# Altium PCB PCB1.PcbDoc
Units mm, origin at the board's own origin, x right, y up, seen from the top; angles counter-clockwise.
Board outline 43 x 28 mm, 2 copper layers (Top Layer, Bottom Layer); 7 components, 5 nets, 22 pads, 0 vias.
Unrouted connection lines stored in the file: 2.
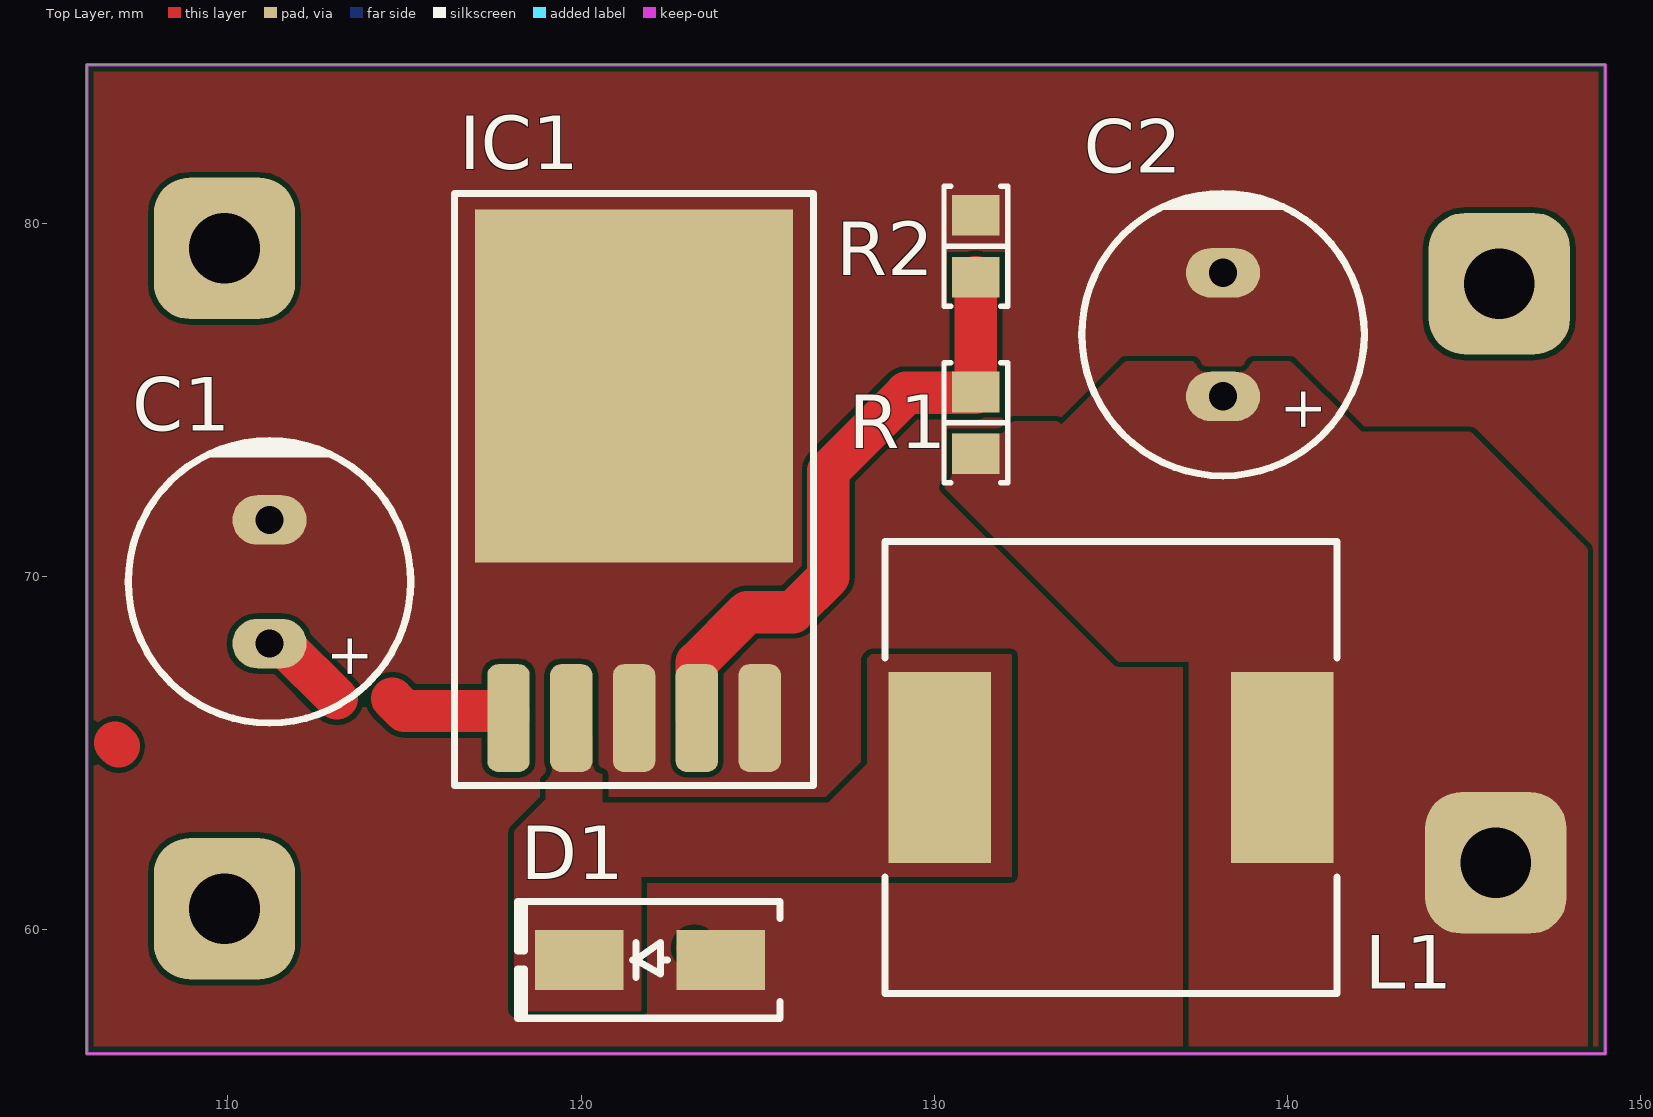
[diagram p0: Top Layer view]
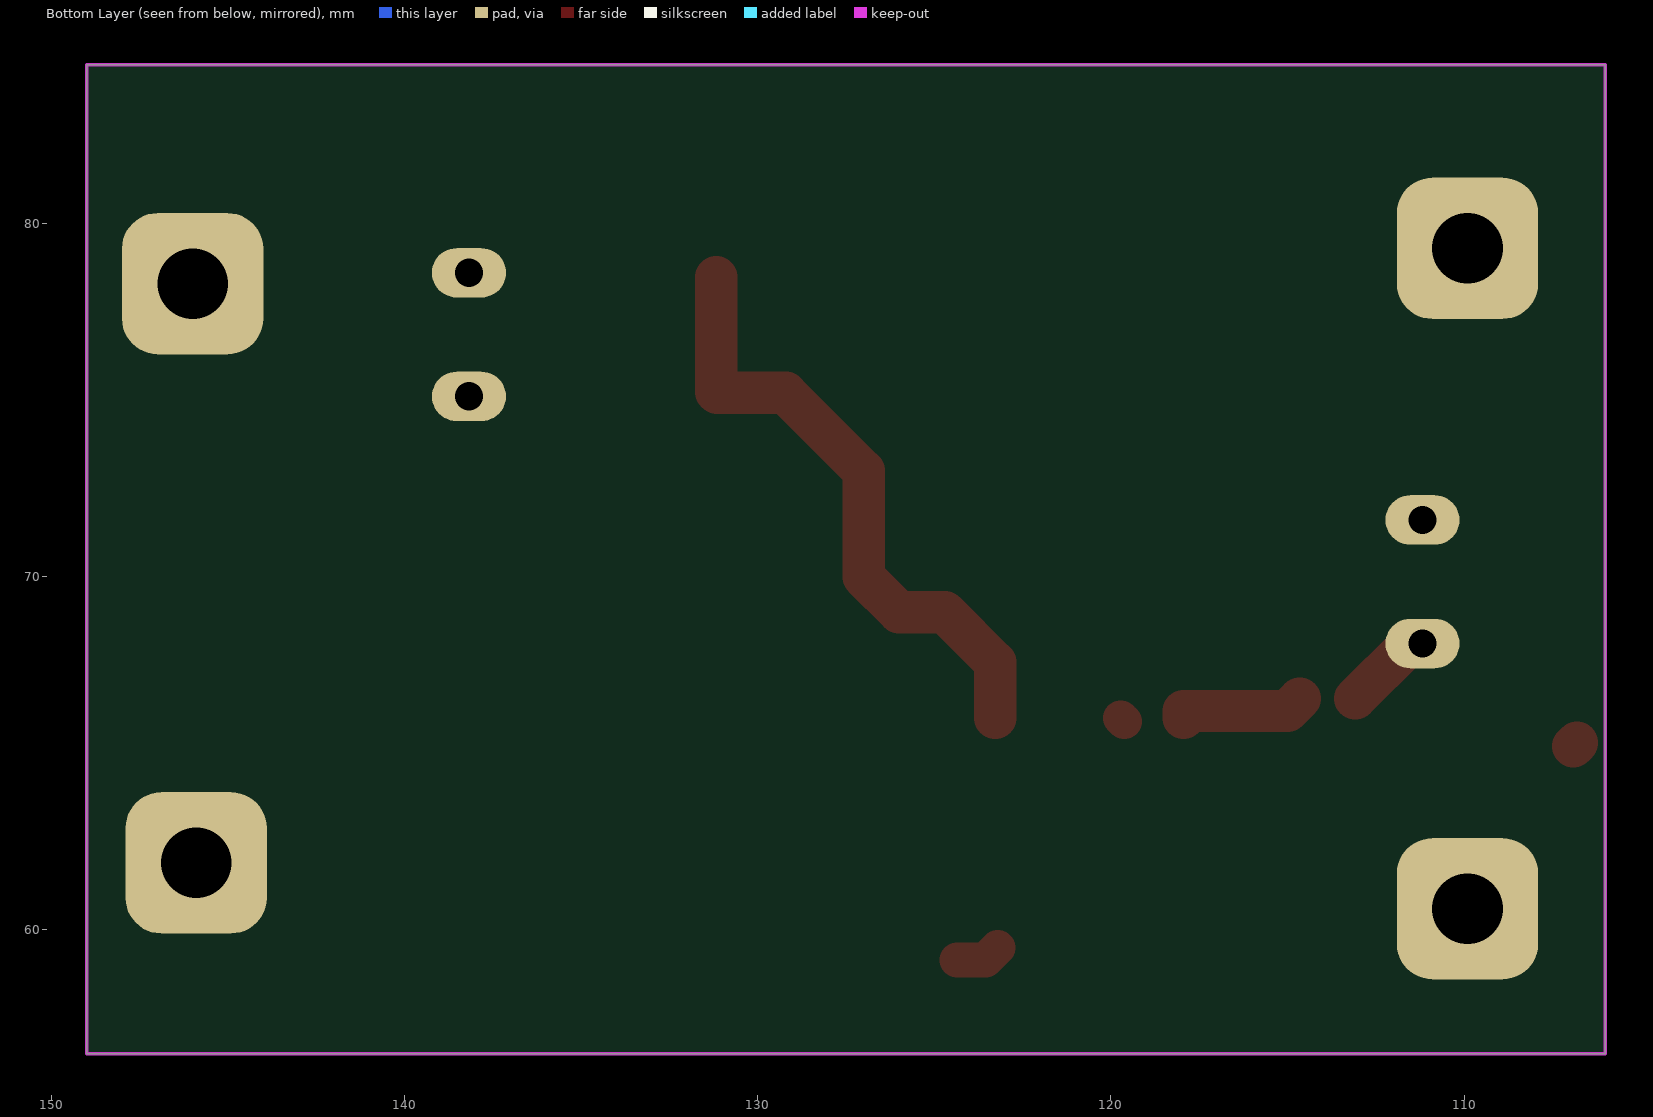
[diagram p1: Bottom Layer view, seen from below]
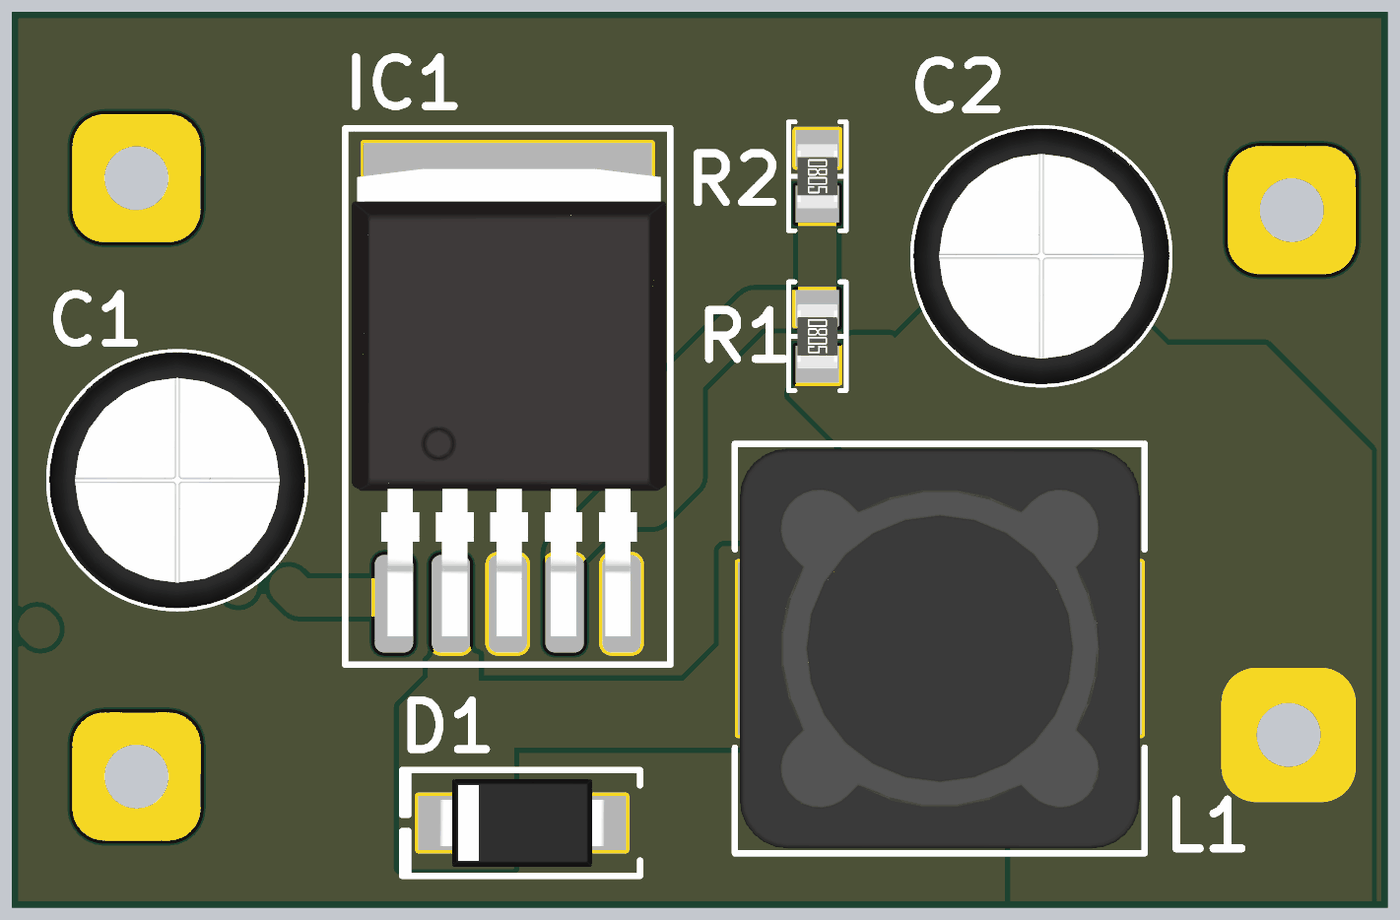
[diagram p2: 3D render of the assembled board from above, using the file's embedded part models]

## Layer stack, top to bottom
Top Solder: solder mask 0.0102, Solder Resist, Dk 3.5
Top Layer: signal copper 0.0356
Dielectric 1: dielectric 0.32, FR-4, Dk 4.8
Bottom Layer: signal copper 0.0356
Bottom Solder: solder mask 0.0102, Solder Resist, Dk 3.5

## Board outline
106,56.5 106,84.5 149,84.5 149,56.5

## Design rules (kind name [scope] priority, off if disabled: settings)
Clearance [All] p1: gap=0.152 ignorepadtopadclearanceinfootprint=TRUE
HoleSize [All] p1: absolutevalues=TRUE maxlimit=5 minlimit=0.025 maxpercent=80.000 minpercent=20.000
PolygonConnect [All] p1: connectstyle=Direct reliefconductorwidth=0.254 reliefentries=4 polygonreliefangle="90 Angle" airgapwidth=0.254
RoutingVias [All] p1: holewidth=0.711 width=1.27 viastyle="Through Hole" minholewidth=0.711 minwidth=1.27 maxholewidth=0.711 maxwidth=1.27
SolderMaskExpansion [All] p1: expansion=0.102 istentingtop=FALSE
Width [All] p1: maxlimit=2 minlimit=0.152 preferedwidth=0.5
29 further rules are at their usual default settings.

## Components (designator, comment, footprint, x,y, rotation, side; value= is the part's Value field where it differs from the comment)
C1 "100µF" "CAP TH ALUM ELEC D8.00mm S3.50mm H12.50mm" 111.176,69.859 r270 top
C2 "220µF" "CAP TH ALUM ELEC D8.00mm S3.50mm H12.50mm" 138.176,76.859 r270 top
D1 "ACDBA560-HF" "DO214AC SMA" 121.95,59.15 r180 top
IC1 "LM2596" PCBComponent_1 121.754,75.525 r0 top
L1 "33µH" "BOURNS SRR1280" 135,64.6 r0 top
R1 "10 kOhms" "RES 0805_2012" 131.176,74.359 r270 top
R2 "4.7 kOhms" "RES 0805_2012" 131.176,79.359 r270 top

## Footprints (in the part's own frame and the unit in brackets; to place one, negate y for a bottom-side part, rotate by r counter-clockwise, add the part's x,y. Pads: shape width x height; smd on the part's side, far side on the other; paste and mask are expansions set on the pad)
"BOURNS SRR1280" [mm] "Precision Wire Wound Inductor, 2-Leads, Body 12.50x12.50mm, IPC Medium Density"
  rect 2.9x5.4 smd: 1(-4.85,0) 2(4.85,0)
  silkscreen extent -6.4,-6.4 6.4,6.4, body extent -6.25,-6.25 6.25,6.25, height 7.9
"CAP TH ALUM ELEC D8.00mm S3.50mm H12.50mm" [mm] "8mm Diameter 3.5mm Lead Spacing Aluminum Electrolytic Capacitors Radial, Can"
  oval 1.4x2.1 hole 0.8: 1(1.75,0) 2(-1.75,0)
  silkscreen extent -4,-4 4,4, body extent -4.01,-4 4,4, height 12.5
"DO214AC SMA" [mm] "Molded Diode, 2-Leads, Body 4.30x2.60mm, IPC Medium Density"
  rect 2.5x1.7 smd: 1(-2,0) 2(2,0)
  silkscreen extent -3.68,-1.65 3.75,1.65, body extent -2.6,-1.37 2.6,1.37, height 2.4
PCBComponent_1 [mm]
  rrect50% 1.2x3.05 smd: 1(-3.81,-9.525) 2(-2.032,-9.525) 3(-0.254,-9.525) 4(1.524,-9.525) 5(3.302,-9.525)
  rect 9x10 smd: 3(-0.254,-0.127)
  silkscreen extent -5.33,-11.43 4.83,5.33, body extent -5.12,-10.54 4.7,4.06, height 4.22
"RES 0805_2012" [mm] "Chip Resistor, 2-Leads, Body 2.00x1.25mm, IPC Medium Density"
  rect 1.15x1.35 smd: 1(-0.875,0) 2(0.875,0)
  silkscreen extent -1.7,-0.9 1.7,0.9, body extent -1,-0.62 1,0.63, height 0.6

## Part data
C1: library part ECA-1JM101, "CAP ALUM 100UF 20% 63V RADIAL", Device Package="Radial, Can", Lifetime @ Temp.="2000 Hrs @ 85°C", Manufacturer="Panasonic Electronic Components", Operating Temperature="-40°C ~ 85°C", Ripple Current @ High Frequency="459mA @ 10kHz", Ripple Current @ Low Frequency="270mA @ 120Hz", Supplier Part Number 1=P5193-ND, Tolerance=±20%, Voltage - Rated=63V, Applications="General Purpose", Capacitance=100µF, ComponentLink1Description=Datasheet, ComponentLink1URL=//media.digikey.com/pdf/Data%20Sheets/Panasonic%20Electronic%20Components/ECA-xxM%20Series,TypeA.pdf, ComponentLink2Description="DigiKey Link", ComponentLink2URL=http://digikey.com/product-detail/en/panasonic-electronic-components/ECA-1JM101/P5193-ND/245052, Height - Seated (Max)="0.492\" (12.50mm)", LastUpdated="7.09.2020 05:24:51", Lead Spacing="0.138\" (3.50mm)", Lifecycle Status=Active, Minimum Order=1, Mounting Type="Through Hole", Package / Case="Radial, Can", Packaging=Bulk, Part Number=ECA-1JM101, Part Status=Active, PartId=7225, Polarization=Polar, Price=0.37, Series=M, Size / Dimension="0.315\" Dia (8.00mm)", Supplier 1=DigiKey
C2: library part ECA-1VM221, "CAP ALUM 220UF 20% 35V RADIAL", Device Package="Radial, Can", Lifetime @ Temp.="2000 Hrs @ 85°C", Manufacturer="Panasonic Electronic Components", Operating Temperature="-40°C ~ 85°C", Ripple Current @ High Frequency="595mA @ 10kHz", Ripple Current @ Low Frequency="350mA @ 120Hz", Supplier Part Number 1=P5166-ND, Tolerance=±20%, Voltage - Rated=35V, Applications="General Purpose", Capacitance=220µF, ComponentLink1Description=Datasheet, ComponentLink1URL=//media.digikey.com/pdf/Data%20Sheets/Panasonic%20Electronic%20Components/ECA-xxM%20Series,TypeA.pdf, ComponentLink2Description="DigiKey Link", ComponentLink2URL=http://digikey.com/product-detail/en/panasonic-electronic-components/ECA-1VM221/P5166-ND/245025, Height - Seated (Max)="0.492\" (12.50mm)", LastUpdated="7.09.2020 05:24:51", Lead Spacing="0.138\" (3.50mm)", Lifecycle Status=Active, Minimum Order=1, Mounting Type="Through Hole", Package / Case="Radial, Can", Packaging=Bulk, Part Number=ECA-1VM221, Part Status=Active, PartId=7280, Polarization=Polar, Price=0.31, Series=M, Size / Dimension="0.315\" Dia (8.00mm)", Supplier 1=DigiKey
D1: "DIODE SCHOTTKY 60V 5A DO214AC", Capacitance @ Vr, F="250pF @ 4V, 1MHz", Current - Average Rectified (Io)="5A (DC)", Current - Reverse Leakage @ Vr="500µA @ 60V", Manufacturer="Comchip Technology", Operating Temperature - Junction="-55°C ~ 125°C", Package / Case="DO-214AC, SMA", Supplier Device Package="DO-214AC (SMA)", Supplier Part Number 1=641-2078-1-ND, Voltage - DC Reverse (Vr) (Max)=60V, Voltage - Forward (Vf) (Max) @ If="700mV @ 5A", ComponentLink1Description=Datasheet, ComponentLink1URL=http://www.comchiptech.com/admin/files/product/ACDBA560-HF%20RevA201382.pdf, ComponentLink2Description="DigiKey Link", ComponentLink2URL=http://digikey.com/product-detail/en/comchip-technology/ACDBA560-HF/641-2078-1-ND/10131664, Diode Type=Schottky, LastUpdated="2.09.2020 01:19:04", Lifecycle Status=Active, Minimum Order=1, Mounting Type="Surface Mount", Packaging=TapeAndReel, Part Number=ACDBA560-HF, Part Status=Active, PartId=1832, Price=0.13, Series="Automotive, AEC-Q101", Speed="Fast Recovery =< 500ns, > 200mA (Io)", Supplier 1=DigiKey
IC1: library part Component_1
L1: library part SRR1280-330M, "FIXED IND 33UH 3.5A 57 MOHM SMD", Current - Saturation=3.3A, Current Rating (Amps)=3.5A, DC Resistance (DCR)="57mOhm Max", Device Package=Nonstandard, Frequency - Self Resonant=9.5MHz, Manufacturer="Bourns Inc.", Operating Temperature="-40°C ~ 125°C", Q @ Freq="28 @ 2.52MHz", Supplier Part Number 1=SRR1280-330MCT-ND, Tolerance=±20%, Inductance Frequency - Test=100kHz, ComponentLink1Description=Datasheet, ComponentLink1URL=https://www.bourns.com/docs/Product-Datasheets/SRR1280.pdf, ComponentLink2Description="DigiKey Link", ComponentLink2URL=http://digikey.com/product-detail/en/bourns-inc/SRR1280-330M/SRR1280-330MCT-ND/2127440, Height - Seated (Max)="0.315\" (8.00mm)", LastUpdated="2.09.2020 01:22:09", Lifecycle Status=Active, Material - Core=Ferrite, Minimum Order=1, Mounting Type="Surface Mount", Package / Case=Nonstandard, Packaging=TapeAndReel, Part Number=SRR1280-330M, Part Status=Active, PartId=25, Price=0.65, Series=SRR1280, Shielding=Shielded, Size / Dimension="0.492\" L x 0.492\" W (12.50mm x 12.50mm)", Supplier 1=DigiKey, Type=Wirewound, Inductance=33µH
R1: library part RNCP0805FTD10K0, "RES 10K OHM 1% 1/4W 0805", Device Package="0805 (2012 Metric)", Manufacturer="Stackpole Electronics Inc", Operating Temperature="-55°C ~ 155°C", Power (Watts)="0.25W, 1/4W", Supplier Device Package=0805, Supplier Part Number 1=RNCP0805FTD10K0CT-ND, Temperature Coefficient=±100ppm/°C, Tolerance=±1%, ComponentLink1Description=Datasheet, ComponentLink1URL=https://www.seielect.com/catalog/sei-rncp.pdf, ComponentLink2Description="DigiKey Link", ComponentLink2URL=http://digikey.com/product-detail/en/stackpole-electronics-inc/RNCP0805FTD10K0/RNCP0805FTD10K0CT-ND/2240601, Composition="Thin Film", Features="Anti-Sulfur, Moisture Resistant", Height - Seated (Max)="0.024\" (0.60mm)", LastUpdated="2.09.2020 01:15:23", Lifecycle Status=Active, Minimum Order=1, Number of Terminations=2, Package / Case="0805 (2012 Metric)", Packaging=TapeAndReel, Part Number=RNCP0805FTD10K0, Part Status=Active, PartId=28021, Price=0.01, Resistance="10 kOhms", Series=RNCP, Size / Dimension="0.079\" L x 0.049\" W (2.00mm x 1.25mm)", Supplier 1=DigiKey
R2: library part CRGP0805F4K7, "CRGP 0805 4K7 1%", Device Package="0805 (2012 Metric)", Manufacturer="TE Connectivity Passive Product", Operating Temperature="-55°C ~ 155°C", Power (Watts)="0.333W, 1/3W", Supplier Device Package=0805, Supplier Part Number 1=A130485CT-ND, Temperature Coefficient=±100ppm/°C, Tolerance=±1%, ComponentLink1Description=Datasheet, ComponentLink1URL=https://www.te.com/commerce/DocumentDelivery/DDEController?Action=srchrtrv&DocNm=9-1773463-9&DocType=DS&DocLang=English, ComponentLink2Description="DigiKey Link", ComponentLink2URL=http://digikey.com/product-detail/en/te-connectivity-passive-product/CRGP0805F4K7/A130485CT-ND/8578317, Composition="Thick Film", Features="Pulse Withstanding", Height - Seated (Max)="0.026\" (0.65mm)", LastUpdated="2.09.2020 01:15:22", Lifecycle Status=Active, Minimum Order=1, Number of Terminations=2, Package / Case="0805 (2012 Metric)", Packaging=TapeAndReel, Part Number=CRGP0805F4K7, Part Status=Active, PartId=28726, Price=0.02, Resistance="4.7 kOhms", Series=CRGP, Size / Dimension="0.079\" L x 0.049\" W (2.00mm x 1.25mm)", Supplier 1=DigiKey

## Free pads (board coordinates)
  rrect50% 4x4 hole 2: GND(109.9,79.3) GND(146,78.3) VIN(109.9,60.6) VOUT(145.9,61.9)

## Nets (pads, with @x,y where several pads share a name; then routed paths per layer and width w, separated by ;. In a path a pad name is that pad's centre, name@x,y a point inside that pad or via, vN(x,y) a via of type N, cw(c..) or ccw(c..) an arc to the next point about the centre after c; other vN are vias at no path point)
+12: C2.1 L1.2 pad.VOUT R1.2
FeedBack: IC1.4 R1.1 R2.2 | length 17.7
  Top Layer w1.2: IC1.4 123.278,67.575 124.703,69 126,69 127,70 127,73 129.209,75.209 131.151,75.209 R1.1 R2.2
GND: C1.2 C2.2 D1.1 IC1.3 IC1.5 R2.1 | length 1.3
  Top Layer w1: D1.1@123.2,59.5 123.55,59.15 D1.1 D1.1@124.35,59.15
NetD1_2: D1.2 IC1.2 L1.1 | length 0.1
  Top Layer w1: IC1.2@119.622,65.9 IC1.2
VCC: C1.1 IC1.1 pad.VIN | length 6.6
  Top Layer w1.2: pad.VIN pad.VIN@110.2,60.9 ; C1.1 111.241,68.044 111.591,68.044 113.083,66.552 ; 114.648,66.552 115,66.2 117.944,66.2 IC1.1
copper on no net: | length 0.1
  Top Layer w1.2: 106.802,65.3 106.902,65.2

## Polygon pours and split planes (outlines as drawn)
GND on Top Layer "GND_L01_P005" (solid, pour order 5): 106.2,84.4 148.9,84.4 148.9,56.8 148.7,56.6 106.2,56.6
NetD1_2 on Top Layer "NETD1_2_L01_P002" (solid, pour order 2): 132.2,67.8 132.2,61.5 121.7,61.5 121.7,57.7 118.1,57.7 118.1,62.8 119,63.7 119,67.7 120.6,67.7 120.6,63.6 127,63.6 128.1,64.7 128.1,67.8
+12 on Top Layer "+12_L01_P001" (solid, pour order 1): 130.2,74.3 130.2,72.6 135.2,67.6 137.2,67.6 137.2,56.7 148.5,56.7 148.5,70.8 145.2,74.1 142.1,74.1 140.1,76.1 135.4,76.1 133.6,74.3 133.5,74.4 130.3,74.4

## Keep-outs
Keep-Out Layer:
  the board outline again, w0.1

## Text inside footprints (layer, text, board x,y; h text height)
C1: Top Overlay "+" at 112.576,68.409 h2 r270
C2: Top Overlay "+" at 139.576,75.409 h2 r270